# Altium PCB VFD Ura Display.PcbDoc
Units mm, origin at the board's own origin, x right, y up, seen from the top; angles counter-clockwise.
Board outline 100 x 50 mm, 2 copper layers (Top Layer, Bottom Layer); 18 components, 41 nets, 120 pads, 321 vias.
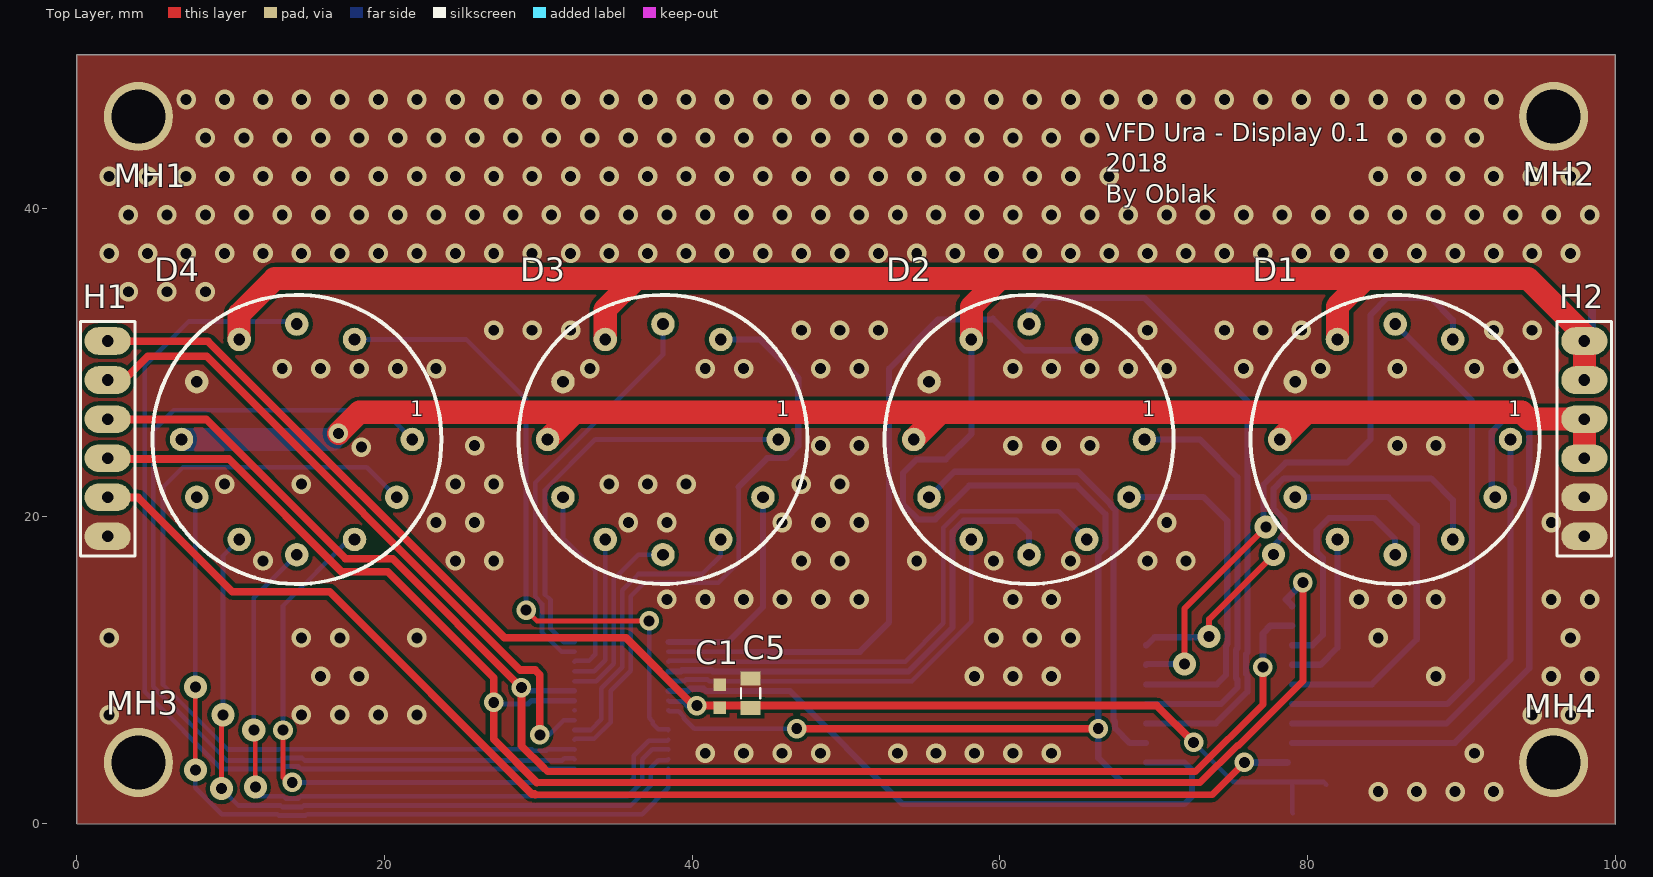
[diagram p0: Top Layer view]
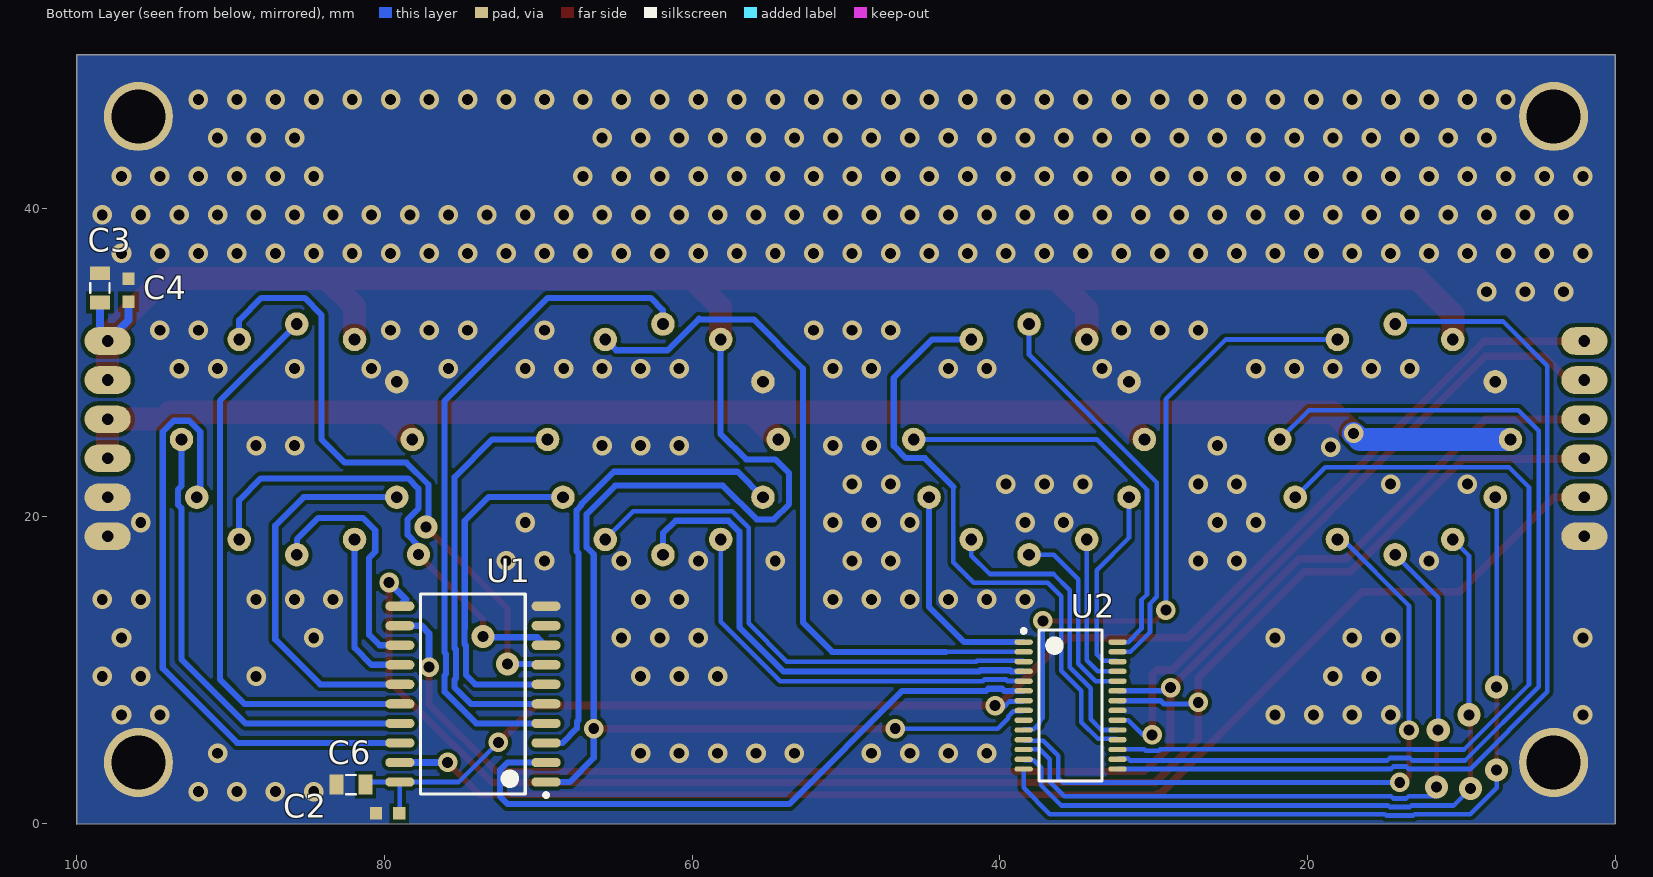
[diagram p1: Bottom Layer view, seen from below]
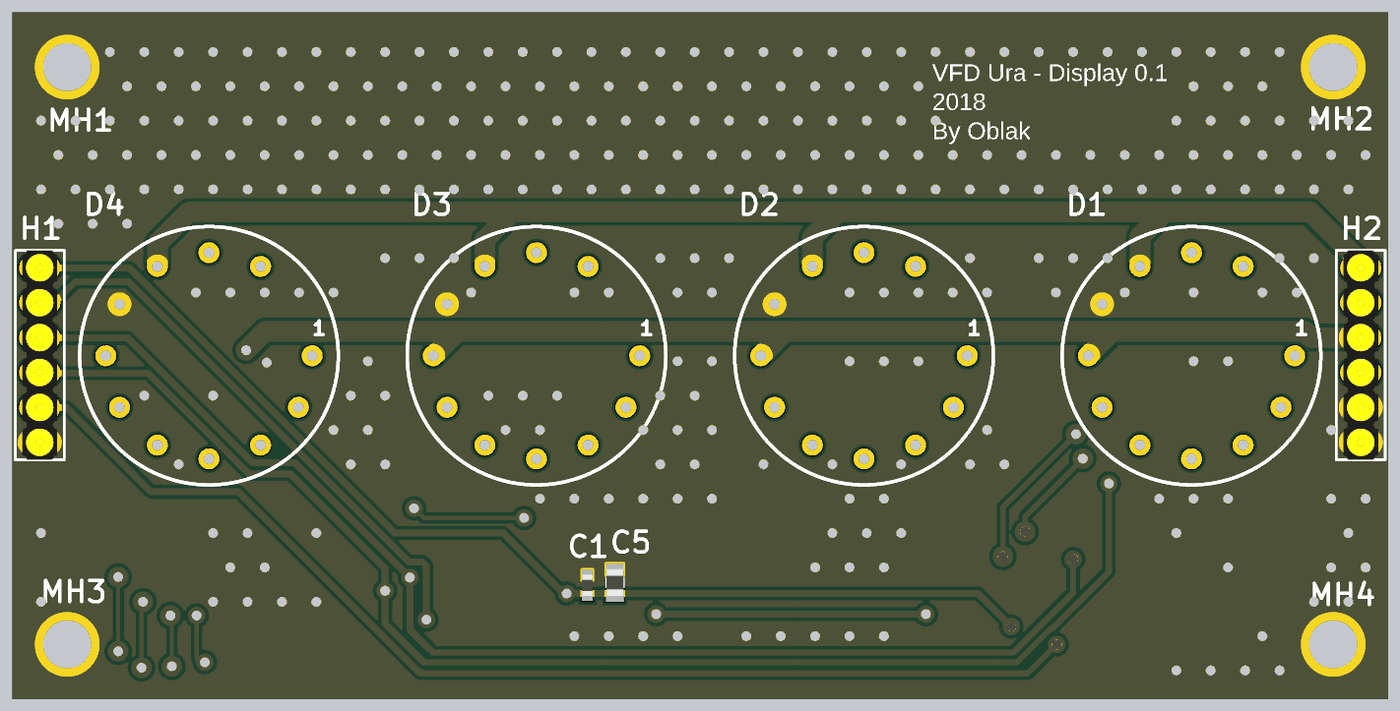
[diagram p2: 3D render of the assembled board from above, using the file's embedded part models]
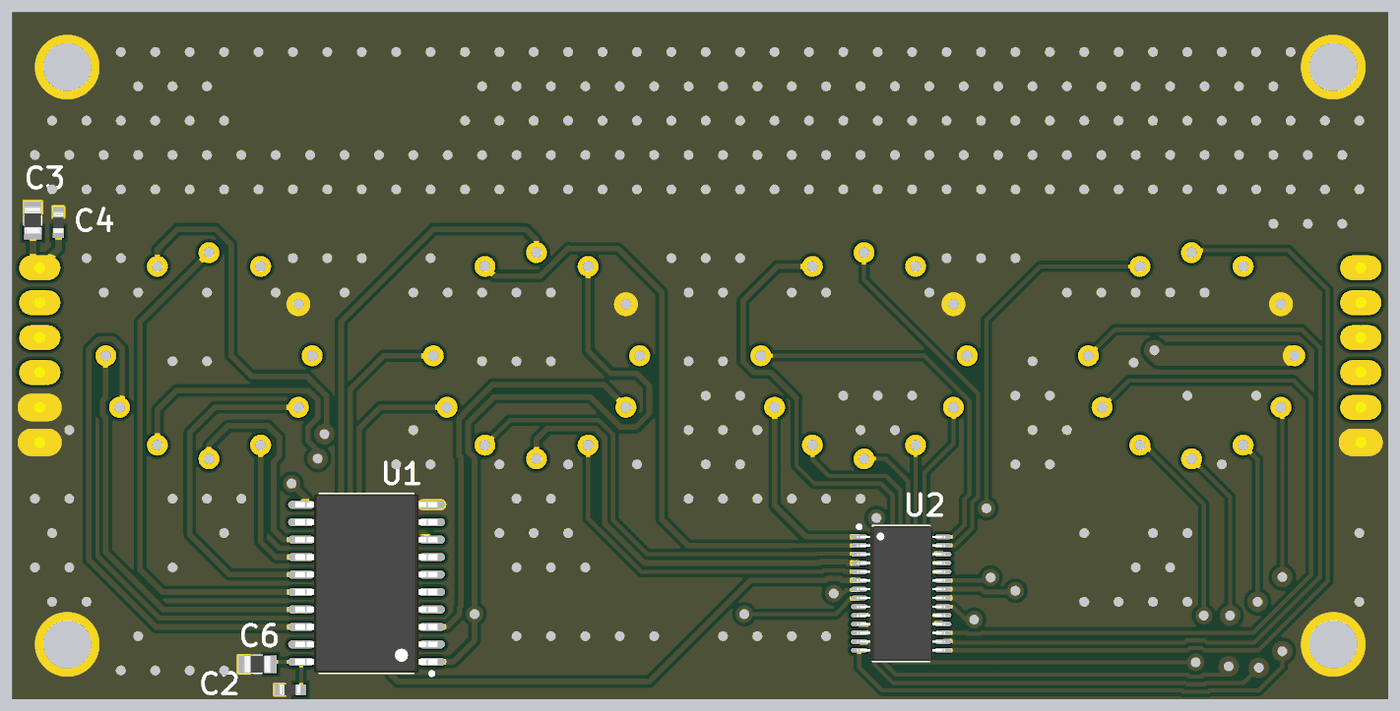
[diagram p3: 3D render of the assembled board from below, using the file's embedded part models]

## Layer stack, top to bottom
Top Solder: solder mask 0.0102, Solder Resist, Dk 3.5
Top Layer: signal copper 0.0356
Dielectric 1: dielectric 0.32, FR-4, Dk 4.8
Bottom Layer: signal copper 0.0356
Bottom Solder: solder mask 0.0102, Solder Resist, Dk 3.5

## Board outline
0,0 100,0 100,50 0,50

## Design rules (kind name [scope] priority, off if disabled: settings)
Clearance [All] p1: gap=0.254 ignorepadtopadclearanceinfootprint=FALSE except(0: Arc-Hole Track-Hole SMDPad-Hole THPad-Hole Via-Hole Fill-Hole Poly-Hole Region-Hole Text-Hole)
PlaneConnect [All] p1: planeconnectstyle=Direct reliefexpansion=0.508 reliefentries=4 reliefconductorwidth=0.254 reliefairgap=0.254
PolygonConnect [All] p1: connectstyle=Direct reliefconductorwidth=0.254 reliefentries=4 polygonreliefangle="90 Angle" airgapwidth=0.254
RoutingVias [All] p1: holewidth=0.711 width=1.4 viastyle="Through Hole" minholewidth=0.711 minwidth=1.27 maxholewidth=1 maxwidth=2
SolderMaskExpansion [All] p1: expansion=0.102
Width [All] p1: maxlimit=5 minlimit=0.254 preferedwidth=0.35 minimp=50.000000 maximp=50.000000 favimp=50.000000
29 further rules are at their usual default settings.

## Components (designator, comment, footprint, x,y, rotation, side; value= is the part's Value field where it differs from the comment)
C1 "25V, 100nF" "0603_1.6x0.8x0.8mm_Reflow Soldering" 41.8,8.3 r270 top value=100nF
C2 "25V, 100nF" "0603_1.6x0.8x0.8mm_Reflow Soldering" 79.8,0.701 r180 bottom value=100nF
C3 "25V, 4.7uF" "0805_2x1.25x1.25mm_Reflow Soldering" 98.5,34.85 r270 bottom value=4.7uF
C4 "25V, 100nF" "0603_1.6x0.8x0.8mm_Reflow Soldering" 96.646,34.7 r270 bottom value=100nF
C5 "6.3V, 22uF" "0805_2x1.25x1.25mm_Reflow Soldering" 43.8,8.5 r270 top value=22uF
C6 "6.3V, 22uF" "0805_2x1.25x1.25mm_Reflow Soldering" 82.179,2.555 r180 bottom value=22uF
D1 "IV-6 VFD Tube" IV-6 85.7,25 r0 top locked
D2 "IV-6 VFD Tube" IV-6 61.9,25 r0 top locked
D3 "IV-6 VFD Tube" IV-6 38.1,25 r0 top locked
D4 "IV-6 VFD Tube" IV-6 14.3,25 r0 top locked
H1 "header6" Letev6 2,31.4 r90 top
H2 "header6" Letev6 98,31.4 r90 top
MH1 "Mounting Hole M3" "Mounting Hole M3"#1 3,45 r0 top
MH2 "Mounting Hole M3" "Mounting Hole M3"#2 97,45 r0 top
MH3 "Mounting Hole M3" "Mounting Hole M3"#3 4,4 r0 top
MH4 "Mounting Hole M3" "Mounting Hole M3"#4 96,3 r0 top
U1 "MAX6920" "SO20 Wide" 74.25,8.445 r0 bottom
U2 "MAX6921AUI" "TSOP 28" 35.4,7.7 r180 bottom

## Footprints (in the part's own frame and the unit in brackets; to place one, negate y for a bottom-side part, rotate by r counter-clockwise, add the part's x,y. Pads: shape width x height; smd on the part's side, far side on the other; paste and mask are expansions set on the pad)
"0603_1.6x0.8x0.8mm_Reflow Soldering" [mm] "Ceramic Capacitors, 0603, body 1.6x0.8mm"
  rect 0.8x0.8 smd: 1(-0.75,0) 2(0.75,0)
  body extent -0.8,-0.4 0.8,0.4, height 0.83
"0805_2x1.25x1.25mm_Reflow Soldering" [mm] "Ceramic Capacitors, 0805, body 2x1.25mm"
  rect 0.9x1.3 smd: 1(-0.95,0) 2(0.95,0)
  silkscreen extent -0.32,-0.62 0.32,0.63, body extent -1,-0.62 1,0.63, height 1.28
IV-6 [mil]
  round 60 hole 30: 1(295.28,0) 2(255.91,-147.64) 3(147.64,-255.91) 4(0,-295.28) 5(-147.64,-255.91) 6(-255.91,-147.64) 7(-295.28,0) 8(-255.91,147.64) 9(-147.64,255.91) 10(0,295.28) 11(147.64,255.91)
  silkscreen extent -370,-370 370,370
Letev6 [mm]
  oval 1.8x3 hole 0.762: 1(0,0) 2(-2.54,0) 3(-5.08,0) 4(-7.62,0) 5(-10.16,0) 6(-12.7,0)
  silkscreen extent -13.97,-1.78 1.27,1.78, body extent -13.97,-1.27 1.27,1.27, height 1.8
"Mounting Hole M3"#1 [mm]
  round 4.5 hole 3.5: 1(1,1)
"Mounting Hole M3"#2 [mm]
  round 4.5 hole 3.5: 1(-1,1)
"Mounting Hole M3"#3 [mm]
  round 4.5 hole 3.5: 1(0,0)
"Mounting Hole M3"#4 [mm]
  round 4.5 hole 3.5: 1(0,1)
"SO20 Wide" [mm] "SOIC, 20-Leads, Body 12,80x7,50mm, Pitch 1,27mm, IPC Medium Density"
  oval 1.9x0.6 smd: 1(-4.75,5.715) 2(-4.75,4.445) 3(-4.75,3.175) 4(-4.75,1.905) 5(-4.75,0.635) 6(-4.75,-0.635) 7(-4.75,-1.905) 8(-4.75,-3.175) 9(-4.75,-4.445) 10(-4.75,-5.715) 11(4.75,-5.715) 12(4.75,-4.445) 13(4.75,-3.175) 14(4.75,-1.905) 15(4.75,-0.635) 16(4.75,0.635) 17(4.75,1.905) 18(4.75,3.175) 19(4.75,4.445) 20(4.75,5.715)
  silkscreen extent -4.87,-6.5 3.4,6.69, body extent -5.16,-6.5 5.16,6.5, height 2.65
"TSOP 28" [mm] "TSOP, 28-Leads, Body 9,70x4,40mm, Pitch 0,64mm, IPC Medium Density"
  oval 1.2x0.35 smd: 1(-3.05,4.128) 2(-3.05,3.493) 3(-3.05,2.858) 4(-3.05,2.223) 5(-3.05,1.588) 6(-3.05,0.953) 7(-3.05,0.318) 8(-3.05,-0.317) 9(-3.05,-0.952) 10(-3.05,-1.587) 11(-3.05,-2.222) 12(-3.05,-2.857) 13(-3.05,-3.492) 14(-3.05,-4.127) 15(3.05,-4.128) 16(3.05,-3.493) 17(3.05,-2.858) 18(3.05,-2.223) 19(3.05,-1.588) 20(3.05,-0.953) 21(3.05,-0.318) 22(3.05,0.317) 23(3.05,0.952) 24(3.05,1.587) 25(3.05,2.222) 26(3.05,2.857) 27(3.05,3.492) 28(3.05,4.127)
  silkscreen extent -3.17,-4.9 2.05,4.98, body extent -3.2,-4.9 3.2,4.9, height 1.1

## Part data
C1 C2 C4: library part 885012206071, "WCAP-CSGP Ceramic Capacitors, 0603, X7R, 25V, 100nF", Operating Temperature="-55 °C to +125 °C", Rated Voltage="25V DC", Ceramic Type=X7R, ComponentLink1Description=Manufacturer, ComponentLink1URL=http://www.we-online.de, ComponentLink2Description=Datasheet, ComponentLink2URL=http://katalog.we-online.de/pbs/datasheet/885012206071.pdf, Part Number=885012206071, Published Date="Oct. 2017", Publisher="Wurth Elektronik", Size=0603
C3: library part 885012107018, "WCAP-CSGP Ceramic Capacitors, 0805, X5R, 25V, 4.7uF", Operating Temperature="-55 °C to +125 °C", Rated Voltage="25V DC", Ceramic Type=X5R, ComponentLink1Description=Manufacturer, ComponentLink1URL=http://www.we-online.de, ComponentLink2Description=Datasheet, ComponentLink2URL=http://katalog.we-online.de/pbs/datasheet/885012107018.pdf, Part Number=885012107018, Published Date="Oct. 2017", Publisher="Wurth Elektronik", Size=0805
C5 C6: library part 885012107005, "WCAP-CSGP Ceramic Capacitors, 0805, X5R, 6.3V, 22uF", Operating Temperature="-55 °C to +125 °C", Rated Voltage="6.3V DC", Ceramic Type=X5R, ComponentLink1Description=Manufacturer, ComponentLink1URL=http://www.we-online.de, ComponentLink2Description=Datasheet, ComponentLink2URL=http://katalog.we-online.de/pbs/datasheet/885012107005.pdf, Part Number=885012107005, Published Date="Oct. 2017", Publisher="Wurth Elektronik", Size=0805
D1 D2 D3 D4: library part IV-6

## Via types
v1: diameter 1.27, hole 0.711, Top Layer to Bottom Layer, tented both sides, 311 vias
v2: diameter 1.5, hole 0.711, Top Layer to Bottom Layer, tented both sides, 10 vias

## Nets (pads, with @x,y where several pads share a name; then routed paths per layer and width w, separated by ;. In a path a pad name is that pad's centre, name@x,y a point inside that pad or via, vN(x,y) a via of type N, cw(c..) or ccw(c..) an arc to the next point about the centre after c; other vN are vias at no path point)
1H1: D3.2 U2.1 | length 14.2
  Bottom Layer w0.4: U2.1 42.327,11.827 44.6,14.1 D3.2
1H2: D3.1 U2.28 | length 27.6
  Bottom Layer w0.3: U2.28 31.656,11.827 30.793,12.69 30.793,14.56 30.434,14.919 30.434,21.733 33.701,25 D3.1
1H3: D3.10 U2.27 | length 26.3
  Bottom Layer w0.3: U2.27 31.507,11.192 30.239,12.461 30.239,14.33 29.8,14.769 29.8,22.2 38.1,30.5 D3.10
1H4: D3.6 U2.26 | length 12.6
  Bottom Layer w0.3: D3.6 31.6,18.6 33.7,16.5 33.7,11.023 33.291,10.614 32.406,10.614 U2.26
1H5: D3.5 U2.25 | length 10.2
  Bottom Layer w0.3: U2.25 33.623,9.922 34.35,10.65 D3.5
1H6: D3.4 U2.24 | length 12.4
  Bottom Layer w0.3: U2.24 33.771,9.287 34.904,10.421 34.904,15.904 36.5,17.5 D3.4
1H7: D3.3 U2.19 | length 19.4
  Bottom Layer w0.3: U2.19 33.413,6.112 34.1,6.8 34.1,8.833 35.458,10.191 35.458,15.2 36.508,16.25 40.65,16.25 41.85,17.45 D3.3
1H8: D3.11 U2.18 | length 39.9
  Bottom Layer w0.3: U2.18 32.406,5.534 33.617,5.534 34.7,6.617 34.7,8.65 36.012,9.962 36.012,14.812 36.896,15.696 41.696,15.696 43.016,17.016 43.016,21.916
  Bottom Layer w0.4: D3.11 44.4,31.5 46.9,29 46.9,24.58 46.104,23.784 44.884,23.784 43.016,21.916
1M1: D1.2 U1.18 | length 40.3
  Bottom Layer w0.4: U1.18 89.57,5.27 94.416,10.116 94.416,25.504 93.704,26.216 92.696,26.216 91.984,25.504 91.984,21.25 D1.2
1M2: D1.1 U1.17 | length 30.4
  Bottom Layer w0.4: U1.17 89.04,6.54 93.2,10.7 93.2,20.53 93.416,20.746 93.416,21.754 93.2,21.97 D1.1
1M3: D1.10 U1.16 | length 37.5
  Bottom Layer w0.4: U1.16 89.11,7.81 90.7,9.4 90.7,27.5 D1.10
1M4: D1.6 U1.15 | length 25.4
  Bottom Layer w0.4: U1.15 84.18,9.08 87.1,12 87.1,19.4 85.25,21.25 D1.6
1M5: D1.5 U1.14 | length 10.5
  Bottom Layer w0.4: U1.14 80.85,10.35 81.95,11.45 D1.5
1M6: D1.4 U1.13 | length 16.3
  Bottom Layer w0.4: U1.13 80.32,11.62 81,12.3 81,17.3 80.6,17.7 80.6,19.1 81.4,19.9 84.3,19.9 85.7,18.5 D1.4
1M7: D1.3 U1.8 | length 31.3
  Top Layer w0.4: v2(73.6,12.2) 73.6,13.32 v2(77.8,17.52)
  Bottom Layer w0.4: U1.8 69.52,11.6 70.056,12.136 73.536,12.136 v2(73.6,12.2) ; v2(77.8,17.52) 77.8,18.097 78.504,18.801 78.504,19.799 77.8,20.503 77.8,21.8 78.466,22.466 88.034,22.466 89.45,21.05 D1.3
1M8: D1.11 U1.7 | length 40.4
  Top Layer w0.4: v2(72,10.4) 72,14 v2(77.3,19.3)
  Bottom Layer w0.4: U1.7 69.55,10.4 v2(72,10.4) ; v2(77.3,19.3) 77.146,19.454 77.146,22.071 78.575,23.5 82.6,23.5 84.1,25 84.1,33.1 85.2,34.2 88,34.2 89.45,32.75 D1.11
2H1: D4.2 U2.17 | length 58
  Bottom Layer w0.3: D4.2 18.85,23.2 6.9,23.2 5.6,21.9 5.6,9.068 9.825,4.842 13.106,4.842 13.111,4.847 29.584,4.847 29.67,4.761 30.53,4.761 30.616,4.847 32.346,4.847 U2.17
2H2: D4.1 U2.16 | length 64.4
  Bottom Layer w0.3: D4.1 19.9,26.9 6.3,26.9 4.954,25.554 4.954,8.931 9.758,4.126 13.174,4.126 13.34,4.293 14.66,4.293 14.826,4.126 31.548,4.126 31.685,4.264 32.294,4.264 U2.16
2H3: D4.10 U2.15 | length 62.5
  Bottom Layer w0.3: D4.10 14.134,32.666 7.266,32.666 4.4,29.8 4.4,8.6 9.428,3.572 13.403,3.572 13.57,3.739 14.43,3.739 14.597,3.572 U2.15
2H4: D4.6 U2.14 | length 53.2
  Top Layer w0.3: v2@7.7,2.9 v2(7.7,3.5) v2(7.7,8.9)
  Bottom Layer w0.3: v2(7.7,3.5) 7.7,2.368 9.422,0.646 13.018,0.646 13.111,0.553 14.889,0.553 14.982,0.646 36.746,0.646 38.45,2.35 U2.14 ; v2(7.7,8.9) 7.7,20.75 8,21.05 D4.6
2H5: D4.5 U2.13 | length 48.2
  Top Layer w0.3: v2(9.4,2.3) 9.4,7.1 v2(9.5,7.1)
  Bottom Layer w0.3: v2(9.4,2.3) 10.5,1.2 13.247,1.2 13.34,1.107 14.66,1.107 14.753,1.2 36,1.2 37.3,2.5 37.3,3.666 37.785,4.151 38.394,4.151 U2.13 ; v2(9.5,7.1) 9.5,17.45 D4.5
2H6: D4.4 U2.12 | length 46
  Top Layer w0.3: v2(11.5,6.1) 11.6,6 v2(11.6,2.4)
  Bottom Layer w0.3: v2(11.5,6.1) 11.5,14.7 D4.4 ; v2(11.6,2.4) 11.6,1.8 13.431,1.8 13.57,1.661 14.43,1.661 14.569,1.8 35.8,1.8 36.746,2.746 36.746,4.2 37.4,4.854 38.438,4.854 U2.12
2H7: D4.3 U2.11 | length 44.8
  Top Layer w0.3: v1(13.4,6.1) 13.4,3 13.7,2.7 v1(14,2.7)
  Bottom Layer w0.3: v1(13.4,6.1) 13.4,14.2 17.7,18.5 D4.3 ; v1(14,2.7) 35.917,2.7 36.192,2.975 36.192,4.429 37.184,5.421 38.394,5.421 U2.11
2H8: D4.11 U2.10 | length 42.8
  Top Layer w0.3: v1(29.2,13.9) 29.9,13.2 v1(37.2,13.2)
  Bottom Layer w0.3: D4.11 25.3,31.5 29.2,27.6 v1(29.2,13.9) ; v1(37.2,13.2) 37.2,6.9 37.446,6.654 37.446,6.508 37.785,6.169 38.45,6.169 U2.10
2M1: D2.2 U1.6 | length 22.6
  Bottom Layer w0.4: D2.2 73.25,21.25 74.788,19.712 74.788,12.715 74.804,12.699 74.804,11.701 74.703,11.6 74.703,9.683 74.1,9.08 U1.6
2M2: D2.1 U1.5 | length 27.2
  Bottom Layer w0.4: D2.1 73,25 75.442,22.558 75.442,12.985 75.458,12.97 75.458,11.43 75.357,11.329 75.357,9.478 75.442,9.393 75.442,8.867 74.385,7.81 U1.5
2M3: D2.10 U1.4 | length 44.6
  Bottom Layer w0.4: D2.10 61.9,33.4 62.7,34.2 69.4,34.2 76.096,27.504 76.096,13.256 76.112,13.24 76.112,11.159 76.011,11.058 76.011,9.749 76.096,9.664 76.096,8.596 74.04,6.54 U1.4
2M4: D2.6 U1.3 | length 30.6
  Bottom Layer w0.4: D2.6 57.05,22.9 65.1,22.9 67.184,20.816 67.184,20.746 67.52,20.41 67.52,17.725 67.4,17.605 67.4,6.74 67.489,6.651 67.489,6.211 68.43,5.27 U1.3
2M5: D2.5 U2.5 | length 26.7
  Bottom Layer w0.3: U2.5 38.455,9.293 39.499,9.293 39.599,9.393 41.001,9.393 41.107,9.287 54.287,9.287 58.15,13.15 D2.5
2M6: D2.4 U2.4 | length 32.9
  Bottom Layer w0.4: U2.4 39.274,9.922 39.348,9.997 41.251,9.997 41.326,9.922 54.068,9.922 56.934,12.788 56.934,19.004 57.646,19.716 61.084,19.716 61.9,18.9 D2.4
2M7: D2.3 U2.3 | length 35.7
  Bottom Layer w0.3: U2.3 38.493,10.601 41.502,10.601 41.545,10.557 53.849,10.557 56.33,13.038 56.33,19.254 57.396,20.32 63.83,20.32 D2.3
2M8: D2.11 U2.2 | length 47
  Bottom Layer w0.3: U2.2 43.5,11.192 ; 59.5,32.8 59.55,32.85
  Bottom Layer w0.4: 43.5,11.192 50.892,11.192 52.8,13.1 52.8,29.6 56,32.8 59.5,32.8 ; 59.55,32.85 61.6,30.8 64.95,30.8 D2.11
+1.5V: D1.7 D2.7 D3.7 D4.7 H2.3 H2.4 | length 102.1
  Top Layer w1.5: v1(17,25.4) 18.366,26.766 32.366,26.766 ; D3.7 32.366,26.766 ; D2.7 56.166,26.766 ; D1.7 79.966,26.766 ; H2.4 H2.3 94.377,26.32 93.931,26.766 79.966,26.766 ; 32.366,26.766 56.166,26.766 ; 56.166,26.766 79.966,26.766
  Bottom Layer w1.5: D4.7 16.6,25 v1(17,25.4)
+3V3: C1.2 C2.2 C5.2 C6.2 H1.1 U1.20 U2.7 | length 95.3
  Top Layer w0.5: H1.1@2,31.38 8.52,31.38 27.8,12.1 35.7,12.1 40.1,7.7 v1(40.3,7.7) 70.2,7.7 v1(72.6,5.3)
  Bottom Layer w0.3: U2.7 38.506,7.961 39.391,7.961 39.752,7.6 39.852,7.7 v1(40.3,7.7) ; v1(72.6,5.3) 75.17,2.73 U1.20 ; C2.2 79,0.751 U1.20 ; C6.2 81.054,2.73 U1.20
+30V: C3.2 C4.2 D1.9 D2.9 D3.9 D4.9 H2.1 H2.2 U1.1 U2.8 | length 191.8
  Top Layer w0.5: v1(46.8,6.2) v1(66.4,6.2)
  Top Layer w1.5: D4.9 10.55,33.15 12.861,35.461 36.361,35.461 ; D3.9 34.35,33.45 36.361,35.461 ; D2.9 58.15,33.611 60,35.461 ; D1.9 81.95,33.65 83.761,35.461 ; H2.2 H2.1 98,31.8 94.339,35.461 83.761,35.461 ; 36.361,35.461 60,35.461 ; 60,35.461 83.761,35.461
  Bottom Layer w0.3: U2.8 38.506,7.326 39.115,7.326 39.454,6.987 39.454,6.877 40.131,6.2 v1(46.8,6.2)
  Bottom Layer w0.4: D2.9 58.15,25.35 56.5,23.7 54.6,23.7 53.7,22.8 53.7,20.8 54.7,19.8 55.8,19.8 58,22 65,22 66.866,20.134 66.866,17.996 66.4,17.53 66.4,4.3 67.97,2.73 U1.1
  Bottom Layer w0.5: C4.2 96.646,32.754 H2.1 98.5,31.9 C3.2
GND: C1.1 C2.1 C3.1 C4.1 C5.1 C6.1 D1.8 D2.8 D3.8 D4.8 H1.6 H2.5 H2.6 MH1.1 MH2.1 MH3.1 MH4.1 U1.10 U2.21 | length 0
  Bottom Layer w0.3: U2.21 U2.21@32.367,7.4
  other v1: 84.6,2.1 87.1,2.1 89.6,2.1 92.1,2.1 40.85,4.6 43.35,4.6 45.85,4.6 48.35,4.6 53.35,4.6 55.85,4.6 58.35,4.6 60.85,4.6 63.35,4.6 90.85,4.6 2.1,7.1 14.6,7.1 17.1,7.1 19.6,7.1 22.1,7.1 94.6,7.1 97.1,7.1 15.85,9.6 18.35,9.6 58.35,9.6 60.85,9.6 63.35,9.6 88.35,9.6 95.85,9.6 98.35,9.6 2.1,12.1 14.6,12.1 17.1,12.1 22.1,12.1 59.6,12.1 62.1,12.1 64.6,12.1 84.6,12.1 97.1,12.1 38.35,14.6 40.85,14.6 43.35,14.6 45.85,14.6 48.35,14.6 50.85,14.6 60.85,14.6 63.35,14.6 83.35,14.6 85.85,14.6 88.35,14.6 95.85,14.6 98.35,14.6 12.1,17.1 24.6,17.1 27.1,17.1 47.1,17.1 49.6,17.1 54.6,17.1 59.6,17.1 64.6,17.1 69.6,17.1 72.1,17.1 23.35,19.6 25.85,19.6 35.85,19.6 38.35,19.6 45.85,19.6 48.35,19.6 50.85,19.6 70.85,19.6 95.85,19.6 9.6,22.1 14.6,22.1 24.6,22.1 27.1,22.1 34.6,22.1 37.1,22.1 39.6,22.1 47.1,22.1 49.6,22.1 18.5,24.5 25.85,24.6 48.35,24.6 50.85,24.6 60.85,24.6 63.35,24.6 65.85,24.6 85.85,24.6 88.35,24.6 13.35,29.6 15.85,29.6 18.35,29.6 20.85,29.6 23.35,29.6 33.35,29.6 40.85,29.6 43.35,29.6 48.35,29.6 50.85,29.6 60.85,29.6 63.35,29.6 65.85,29.6 68.35,29.6 70.85,29.6 75.85,29.6 80.85,29.6 85.85,29.6 90.85,29.6 93.35,29.6 27.1,32.1 29.6,32.1 32.1,32.1 47.1,32.1 49.6,32.1 52.1,32.1 69.6,32.1 74.6,32.1 77.1,32.1 79.6,32.1 92.1,32.1 94.6,32.1 3.35,34.6 5.85,34.6 8.35,34.6 2.1,37.1 4.6,37.1 7.1,37.1 9.6,37.1 12.1,37.1 14.6,37.1 17.1,37.1 19.6,37.1 22.1,37.1 24.6,37.1 27.1,37.1 29.6,37.1 32.1,37.1 34.6,37.1 37.1,37.1 39.6,37.1 42.1,37.1 44.6,37.1 47.1,37.1 49.6,37.1 52.1,37.1 54.6,37.1 57.1,37.1 59.6,37.1 62.1,37.1 64.6,37.1 67.1,37.1 69.6,37.1 72.1,37.1 74.6,37.1 77.1,37.1 79.6,37.1 82.1,37.1 84.6,37.1 87.1,37.1 89.6,37.1 92.1,37.1 94.6,37.1 97.1,37.1 3.35,39.6 5.85,39.6 8.35,39.6 10.85,39.6 13.35,39.6 15.85,39.6 18.35,39.6 20.85,39.6 23.35,39.6 25.85,39.6 28.35,39.6 30.85,39.6 33.35,39.6 35.85,39.6 38.35,39.6 40.85,39.6 43.35,39.6 45.85,39.6 48.35,39.6 50.85,39.6 53.35,39.6 55.85,39.6 58.35,39.6 60.85,39.6 63.35,39.6 65.85,39.6 68.35,39.6 70.85,39.6 73.35,39.6 75.85,39.6 78.35,39.6 80.85,39.6 83.35,39.6 85.85,39.6 88.35,39.6 90.85,39.6 93.35,39.6 95.85,39.6 98.35,39.6 2.1,42.1 4.6,42.1 7.1,42.1 9.6,42.1 12.1,42.1 14.6,42.1 17.1,42.1 19.6,42.1 22.1,42.1 24.6,42.1 27.1,42.1 29.6,42.1 32.1,42.1 34.6,42.1 37.1,42.1 39.6,42.1 42.1,42.1 44.6,42.1 47.1,42.1 49.6,42.1 52.1,42.1 54.6,42.1 57.1,42.1 59.6,42.1 62.1,42.1 64.6,42.1 67.1,42.1 84.6,42.1 87.1,42.1 89.6,42.1 92.1,42.1 94.6,42.1 97.1,42.1 8.35,44.6 10.85,44.6 13.35,44.6 15.85,44.6 18.35,44.6 20.85,44.6 23.35,44.6 25.85,44.6 28.35,44.6 30.85,44.6 33.35,44.6 35.85,44.6 38.35,44.6 40.85,44.6 43.35,44.6 45.85,44.6 48.35,44.6 50.85,44.6 53.35,44.6 55.85,44.6 58.35,44.6 60.85,44.6 63.35,44.6 65.85,44.6 85.85,44.6 88.35,44.6 90.85,44.6 7.1,47.1 9.6,47.1 12.1,47.1 14.6,47.1 17.1,47.1 19.6,47.1 22.1,47.1 24.6,47.1 27.1,47.1 29.6,47.1 32.1,47.1 34.6,47.1 37.1,47.1 39.6,47.1 42.1,47.1 44.6,47.1 47.1,47.1 49.6,47.1 52.1,47.1 54.6,47.1 57.1,47.1 59.6,47.1 62.1,47.1 64.6,47.1 67.1,47.1 69.6,47.1 72.1,47.1 74.6,47.1 77.1,47.1 79.6,47.1 82.1,47.1 84.6,47.1 87.1,47.1 89.6,47.1 92.1,47.1
NetH1_2: H1.2 U2.20 | length 43.9
  Top Layer w0.5: H1.2@2,28.84 3.04,28.84 4.6,30.4 8.434,30.4 28.827,10.006 29.794,10.006 30.1,9.7 v1(30.1,5.8)
  Bottom Layer w0.3: v1(30.1,5.8) 30.7,5.8 31.648,6.747 U2.20
NetH1_3: H1.3 U1.12 U2.23 | length 99.1
  Top Layer w0.45: v1@28.9,8.3 v1(28.9,8.867) ; 30.35,3.65 30.596,3.404 72.733,3.404 77.1,7.771 v1(77.1,10.2)
  Top Layer w0.5: H1.3@2,26.3 8.4,26.3 17.466,17.234 20.533,17.234 v1(28.9,8.867) ; v1@28.9,8.3 28.9,5.1 30.35,3.65
  Bottom Layer w0.35: v1(28.9,8.867) 29.115,8.652 U2.23
  Bottom Layer w0.45: v1@77.3,10.4 v1(77.1,10.2) 77.1,12.382 77.608,12.89 U1.12
NetH1_4: H1.4 U1.11 U2.22 | length 105.5
  Top Layer w0.45: 29.9,2.7 73.025,2.7 75.439,5.114 75.514,5.114 79.7,9.3 v1(79.7,15.7)
  Top Layer w0.5: H1.4@2,23.76 2,23.734 9.866,23.734 17.2,16.4 20.2,16.4 27.1,9.5 v1(27.1,7.9) 27.1,5.5 29.9,2.7
  Bottom Layer w0.35: v1(27.1,7.9) 27.197,7.803 29.341,7.803 29.555,8.017 U2.22
  Bottom Layer w0.45: U1.11 79,14.2 78.6,14.6 v1(79.7,15.7)
NetH1_5: H1.5 U1.19 | length 85.6
  Top Layer w0.45: 29.8,1.9 73.8,1.9 v1(75.9,4)
  Top Layer w0.5: H1.5@2,21.22 3.98,21.22 10.1,15.1 16.434,15.1 29.588,1.946 29.754,1.946 29.8,1.9
  Bottom Layer w0.45: v1(75.9,4) U1.19@78.7,4
NetU1_2: U1.2 U2.6 | length 42.3
  Bottom Layer w0.4: U2.6 39.712,8.652 39.849,8.789 40.751,8.789 40.887,8.652 46.348,8.652 53.7,1.3 72,1.3 72.5,1.8 72.5,3.5 72,4 U1.2
pads on no net: U1.9 U2.9

## Polygon pours and split planes (outlines as drawn)
GND on Bottom Layer "Bottom Layer-GND" (solid, pour order 0): 0,50 0,0 100,0 100,50
GND on Top Layer "Top Layer-GND" (solid, pour order 2): 0,50 0,0 100,0 100,50

## Silkscreen, mask and mechanical layers (free items; w line width, h text height)
Top Overlay:
  text "VFD Ura - Display 0.1 / 2018 / By Oblak" at 66.9,40 h2
Mechanical 1:
  the board outline again, w0.75

## Text inside footprints (layer, text, board x,y; h text height)
D1: Top Overlay "1" at 93.066,26.524 h1
D2: Top Overlay "1" at 69.266,26.524 h1
D3: Top Overlay "1" at 45.466,26.524 h1
D4: Top Overlay "1" at 21.666,26.524 h1